# Altium PCB IF_pcb.PcbDoc
Units mm, origin at the board's own origin, x right, y up, seen from the top; angles counter-clockwise.
Board outline 46.61 x 24.13 mm, 2 copper layers (Top Layer, Bottom Layer); 30 components, 16 nets, 66 pads, 4 vias.
Unrouted connection lines stored in the file: 21.
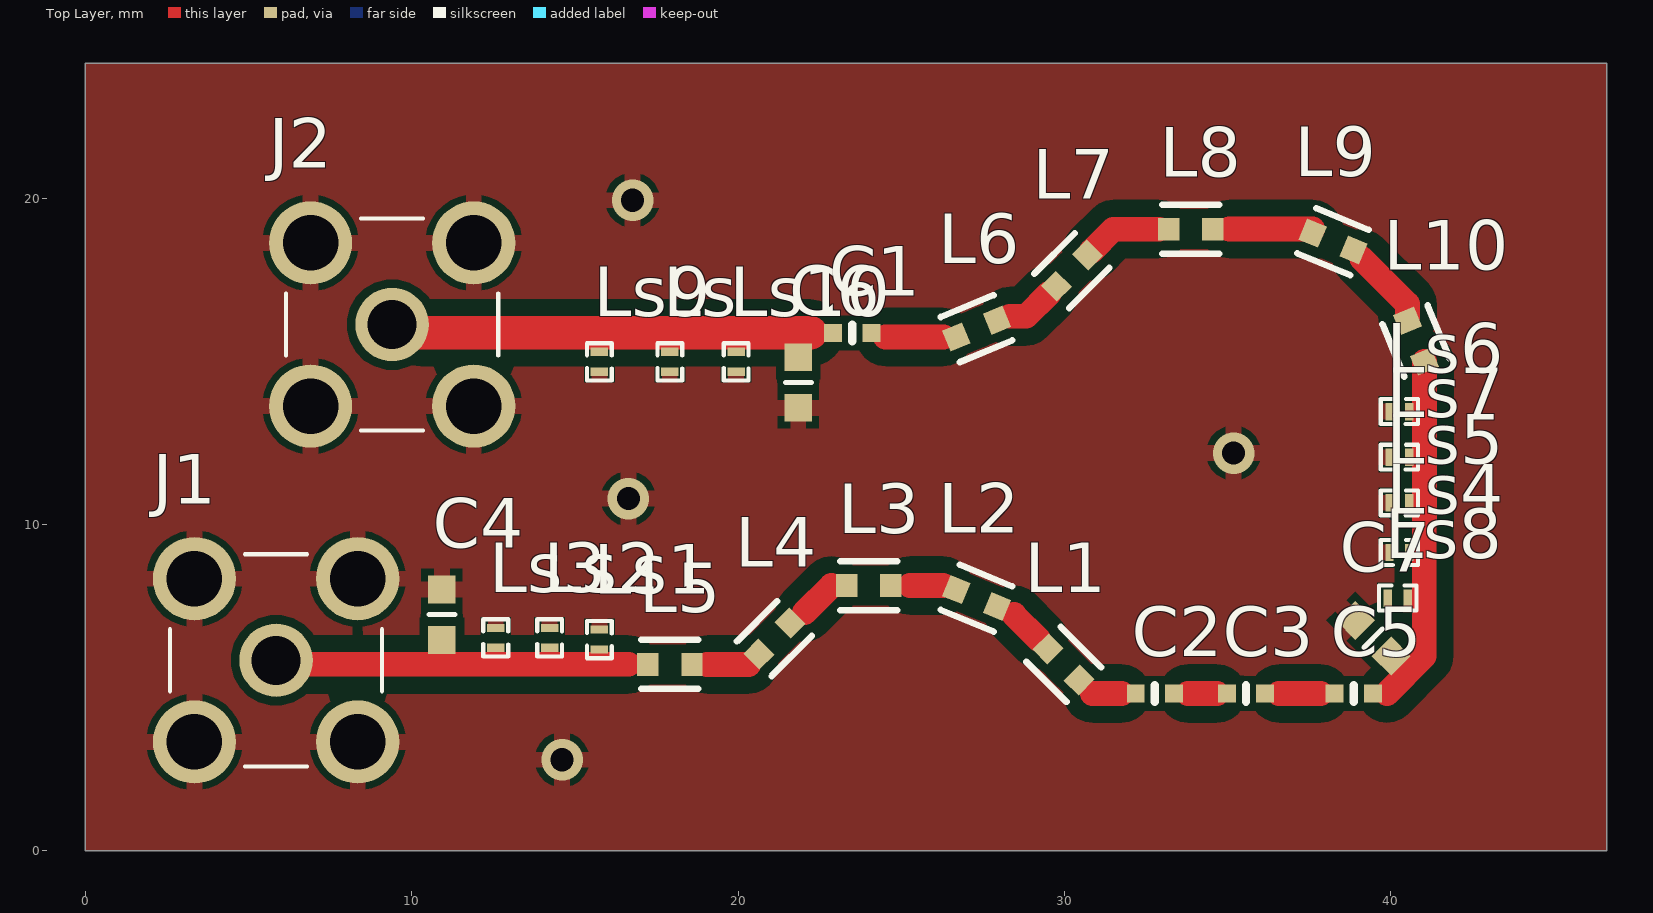
[diagram p0: Top Layer view]
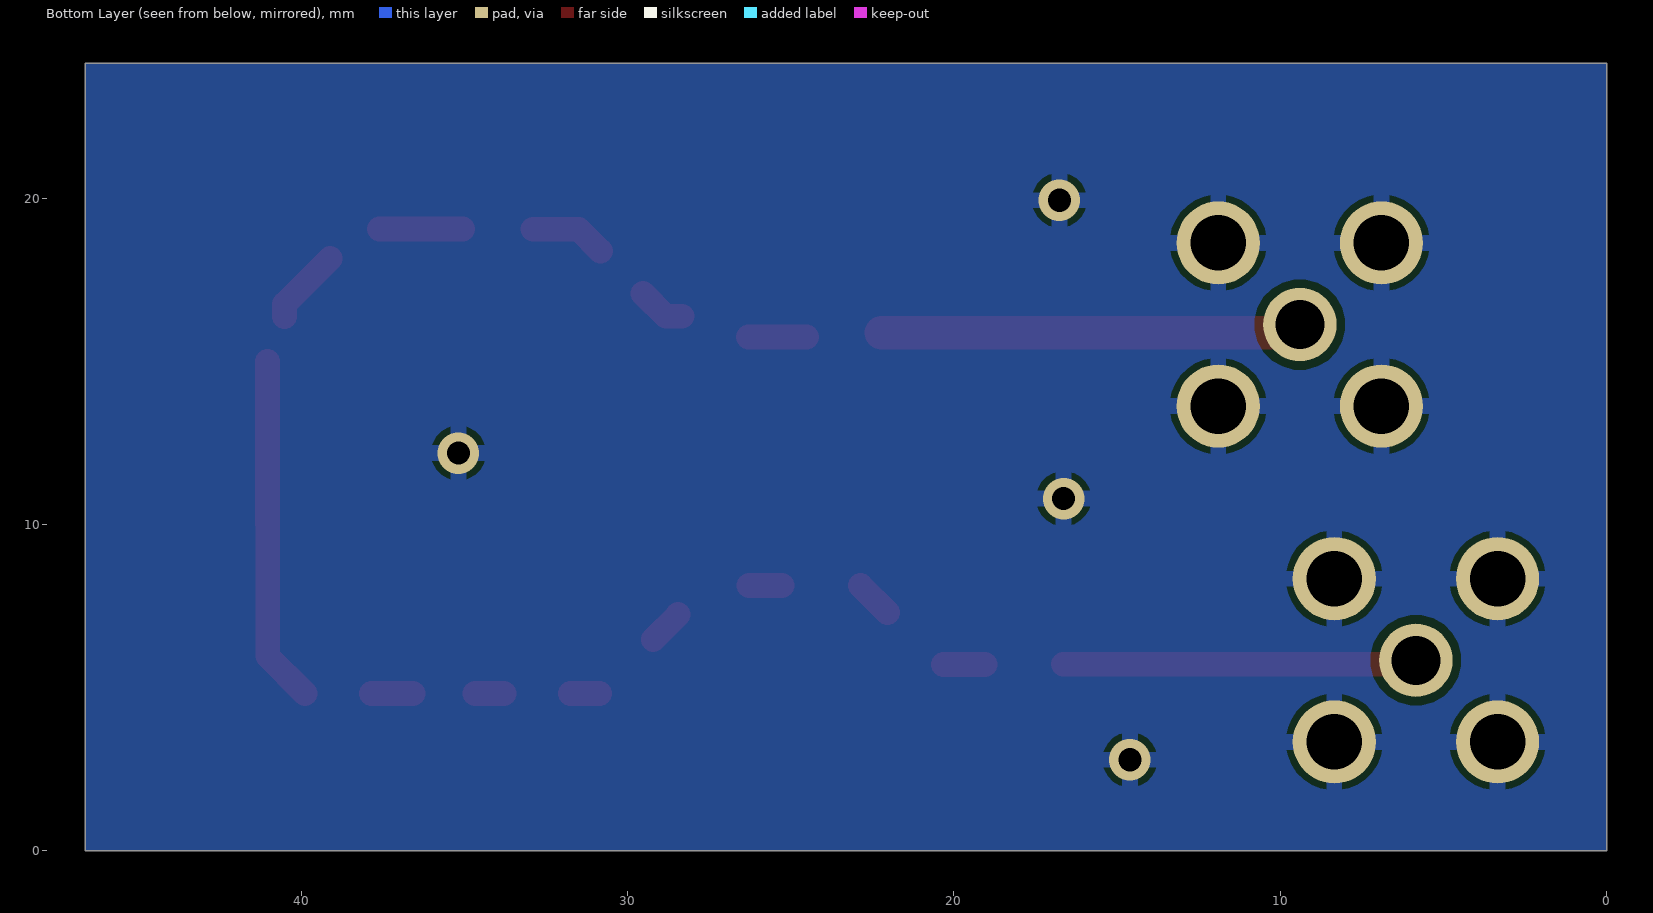
[diagram p1: Bottom Layer view, seen from below]
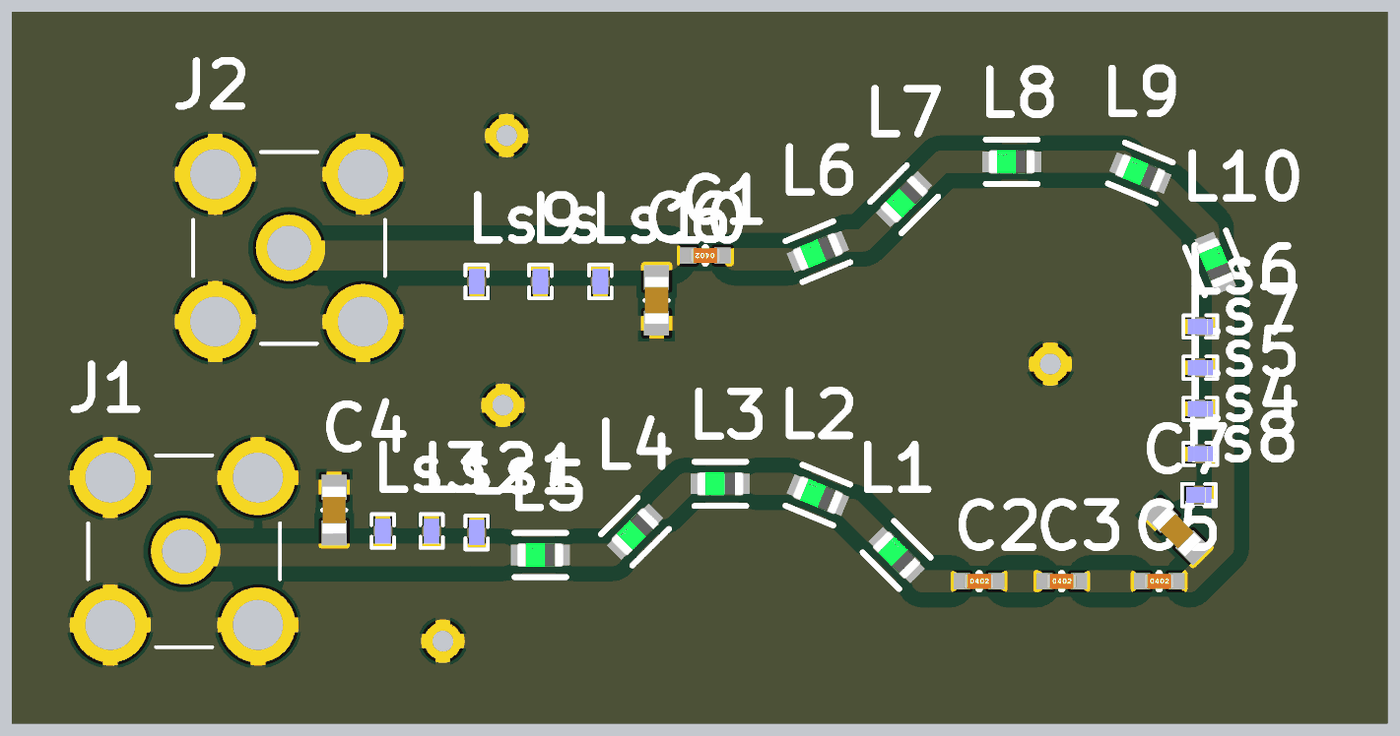
[diagram p2: 3D render of the assembled board from above, using the file's embedded part models]

## Layer stack, top to bottom
Top Solder: solder mask 0.0102, Solder Resist, Dk 3.5
Top Layer: signal copper 0.0356
Dielectric 1: dielectric 0.32, FR-4, Dk 4.8
Bottom Layer: signal copper 0.0356
Bottom Solder: solder mask 0.0102, Solder Resist, Dk 3.5

## Board outline
0,0 46.609,0 46.609,24.13 0,24.13

## Design rules (kind name [scope] priority, off if disabled: settings)
Clearance [All] p1: gap=0.254 ignorepadtopadclearanceinfootprint=FALSE except(0: Arc-Hole Track-Hole SMDPad-Hole THPad-Hole Via-Hole Fill-Hole Poly-Hole Region-Hole Text-Hole; 0.508: Arc-Fill Arc-Poly Arc-Region Track-Fill Track-Poly Track-Region Via-Fill Via-Poly Via-Region)
HoleSize [All] p1: absolutevalues=TRUE maxlimit=3 minlimit=0.7 maxpercent=80.000 minpercent=20.000
MinimumSolderMaskSliver [All] p1: minsoldermaskwidth=0.125
PlaneConnect [All] p1: planeconnectstyle=Relief reliefexpansion=0.508 reliefentries=4 reliefconductorwidth=0.305 reliefairgap=0.254
PolygonConnect [All] p1: connectstyle=Relief reliefconductorwidth=0.5 reliefentries=4 polygonreliefangle="90 Angle" airgapwidth=0.2
RoutingVias [All] p1: holewidth=0.7 width=1.6 viastyle="Through Hole" minholewidth=0.7 minwidth=1.6 maxholewidth=0.7 maxwidth=1.6
SilkToSilkClearance [All] p1: silktosilkclearance=0.12
SilkToSolderMaskClearance [IsPad] p1: minsilkscreentomaskgap=0.1 clearancetoexposedcopper=TRUE
SolderMaskExpansion [All] p1: expansion=0.102 istentingtop=FALSE
Width [All] p1: maxlimit=3.048 minlimit=0.305 preferedwidth=0.508
25 further rules are at their usual default settings.

## Components (designator, comment, footprint, x,y, rotation, side; value= is the part's Value field where it differs from the comment)
C1 "0.50pF" SMD-0402C 23.495,15.875 r90 top
C2 "0.50pF" SMD-0402C 32.766,4.826 r270 top
C3 "0.50pF" SMD-0402C 35.56,4.826 r270 top
C4 "1500pF" SMD-0603C 10.922,7.239 r180 top
C5 "0.50pF" SMD-0402C 38.862,4.826 r270 top
C6 "1500pF" SMD-0603C 21.844,14.351 r0 top
C7 "1800pF" SMD-0603C 39.457,6.517 r225 top
J1 "SMACONNECTOR" LPRS_SMACONNECTOR 5.842,5.842 r270 top
J2 "SMACONNECTOR" LPRS_SMACONNECTOR 9.398,16.129 r0 top
L1 "100nH" FP-LQG18HH_00-MFG 29.972,5.715 r135 top
L2 "390nH" FP-LQG18HH_00-MFG 27.305,7.747 r157.5 top
L3 "390nH" FP-LQG18HH_00-MFG 24.003,8.128 r180 top
L4 "390nH" FP-LQG18HH_00-MFG 21.113,6.508 r225 top
L5 "390nH" FP-LQG18HH_00-MFG 17.907,5.715 r180 top
L6 "390nH" FP-LQG18HH_00-MFG 27.305,16.002 r202.5 top
L7 "390nH" FP-LQG18HH_00-MFG 30.226,17.78 r225 top
L8 "390nH" FP-LQG18HH_00-MFG 33.869,19.05 r180 top
L9 "390nH" FP-LQG18HH_00-MFG 38.227,18.669 r157.5 top
L10 "100nH" FP-LQG18HH_00-MFG 40.767,15.621 r112.5 top
Ls "0302cs_Coil" "0302CS SERIES" 17.907,14.986 r90 top
Ls1 "0302cs_Coil" "0302CS SERIES" 15.748,6.477 r270 top
Ls2 "0302cs_Coil" "0302CS SERIES" 14.224,6.528 r270 top
Ls3 "0302cs_Coil" "0302CS SERIES" 12.573,6.528 r270 top
Ls4 "0302cs_Coil" "0302CS SERIES" 40.259,9.144 r0 top
Ls5 "0302cs_Coil" "0302CS SERIES" 40.259,10.668 r0 top
Ls6 "0302cs_Coil" "0302CS SERIES" 40.259,13.462 r0 top
Ls7 "0302cs_Coil" "0302CS SERIES" 40.259,12.065 r0 top
Ls8 "0302cs_Coil" "0302CS SERIES" 40.208,7.747 r0 top
Ls9 "0302cs_Coil" "0302CS SERIES" 15.748,14.986 r90 top
Ls10 "0302cs_Coil" "0302CS SERIES" 19.939,14.986 r90 top

## Footprints (in the part's own frame and the unit in brackets; to place one, negate y for a bottom-side part, rotate by r counter-clockwise, add the part's x,y. Pads: shape width x height; smd on the part's side, far side on the other; paste and mask are expansions set on the pad)
"0302CS SERIES" [mil] "Coilcraft Chip Inductor"
  rect 10x21 smd: 1(-12,0) 2(12,0)
  silkscreen extent -22,-15 23,15, body extent -17,-13 17,13, height 17
FP-LQG18HH_00-MFG [mm]
  rect 0.65x0.7 smd paste+0 mask+0: 1(-0.675,0) 2(0.675,0)
  silkscreen extent -0.88,-0.75 0.88,0.75, body extent -1.1,-0.58 1.1,0.57, height 0.25
LPRS_SMACONNECTOR [mm]
  round 2.25 hole 1.5: 1(0,0)
  round 2.55 hole 1.7: 2(2.5,2.5) 3(2.5,-2.5) 4(-2.5,-2.5) 5(-2.5,2.5)
  silkscreen extent -3.25,-3.25 3.25,3.25
SMD-0402C [mm]
  rect 0.55x0.55 smd: 1(0,0.584) 2(0,-0.584)
  silkscreen extent -0.25,0 0.25,0, body extent -0.25,-0.51 0.25,0.51, height 0.51
SMD-0603C [mm]
  rect 0.85x0.85 smd: 1(0,0.775) 2(0,-0.775)
  silkscreen extent -0.4,0 0.4,0, body extent -0.4,-0.8 0.4,0.8, height 0.9

## Part data
C1 C2 C3 C5: library part GRM1555C2AR50BA01D, "CAP CER 0.5PF 100V NP0 0402", Digi-Key Part Number=490-7274-1-ND, Manufacturer="Murata Electronics North America", Operating Temperature="-55°C ~ 125°C", Package / Case="0402 (1005 Metric)", Ratings=-, Temperature Coefficient="C0G, NP0", Tolerance=±0.1pF, Voltage=100V, @ qty=0, Applications="General Purpose", Datasheets=http://www.murata.com/~/media/webrenewal/support/library/catalog/products/capacitor/mlcc/c02e.pdf, Factory Stock=0, Features=-, Height - Seated (Max)=-, Image=//media.digikey.com/Renders/Murata%20Renders/ZRB-SERIES-0402.jpg, Lead Spacing=-, Lead Style=-, Minimum Quantity=1, Mounting Type="Surface Mount, MLCC", Packaging="Cut Tape (CT)", Part Number=GRM1555C2AR50BA01D, Part Status=Active, Quantity Available=19378, Series=GRM, Size / Dimension="0.039\" L x 0.020\" W (1.00mm x 0.50mm)", Thickness (Max)="0.022\" (0.55mm)", Unit Price (USD)=0.1
C4 C6: library part GCM1885C1H152JA16D, "CAP CER 1500PF 50V NP0 0603", Digi-Key Part Number=490-4967-1-ND, Manufacturer="Murata Electronics North America", Operating Temperature="-55°C ~ 125°C", Package / Case="0603 (1608 Metric)", Ratings=AEC-Q200, Temperature Coefficient="C0G, NP0", Tolerance=±5%, Voltage=50V, @ qty=0, Applications=Automotive, Datasheets=http://www.murata.com/~/media/webrenewal/support/library/catalog/products/capacitor/mlcc/c03e.ashx, Factory Stock=0, Features=-, Height - Seated (Max)=-, Image=//media.digikey.com/Renders/Murata%20Renders/0603%28GCM188%29.jpg, Lead Spacing=-, Lead Style=-, Minimum Quantity=1, Mounting Type="Surface Mount, MLCC", Packaging="Cut Tape (CT)", Part Number=GCM1885C1H152JA16D, Part Status=Active, Quantity Available=20145, Series=GCM, Size / Dimension="0.063\" L x 0.031\" W (1.60mm x 0.80mm)", Thickness (Max)="0.035\" (0.90mm)", Unit Price (USD)=0.11
C7: library part GCM1885C1H182JA16D, "CAP CER 1800PF 50V NP0 0603", Digi-Key Part Number=490-8004-1-ND, Manufacturer="Murata Electronics North America", Operating Temperature="-55°C ~ 125°C", Package / Case="0603 (1608 Metric)", Ratings=AEC-Q200, Temperature Coefficient="C0G, NP0", Tolerance=±5%, Voltage=50V, @ qty=0, Applications=Automotive, Datasheets=http://www.murata.com/~/media/webrenewal/support/library/catalog/products/capacitor/mlcc/c03e.ashx, Factory Stock=0, Features=-, Height - Seated (Max)=-, Image=//media.digikey.com/Renders/Murata%20Renders/0603%28GCM188%29.jpg, Lead Spacing=-, Lead Style=-, Minimum Quantity=1, Mounting Type="Surface Mount, MLCC", Packaging="Cut Tape (CT)", Part Number=GCM1885C1H182JA16D, Part Status=Active, Quantity Available=13070, Series=GCM, Size / Dimension="0.063\" L x 0.031\" W (1.60mm x 0.80mm)", Thickness (Max)="0.035\" (0.90mm)", Unit Price (USD)=0.16
J1 J2: "SMA female RF coaxial connector for SMA male RF antennas.", Package=None, Availability=Unavailable, MP=SMACONNECTOR, Price=None
L1 L2 L3 L4 L5 L6 L7 L8 L9 L10: library part CMP-06042-016493-1, "Multilayer type RF Inductor 1.8nH ±0.3nH 0.1Ω 1100mA 0603", Case Code (Imperial)=0603, Case Code (Metric)=1608, Current Rating=500mA, DC Resistance (DCR)=100mR, Inductance=1.8nH, Max Operating Temperature=85°C, Min Operating Temperature=-55°C, Package Quantity=4000, Self Resonant Frequency=6GHz, Test Frequency=100MHz, Case/Package=0603, Core Material=Air, DC Current=500mA, Depth=0.95mm, Height=0.8mm, Height - Seated (Max)=0.037inch, Lead Free="Lead Free", Length=1.6mm, Max DC Current=500mA, Military Standard=Not, Mount="Surface Mount", Number of Pins=2, Packaging="Tape and Reel", Q Factor=12, Radiation Hardening=No, Rated Current-Max=500mA, REACH SVHC="No SVHC", RoHS Compliant=Yes, Series=LQG18H, Shielding=Unshielded, Termination=SMD/SMT, Width=0.8mm

## Via types
v1: diameter 1.27, hole 0.711, Top Layer to Bottom Layer, 4 vias

## Nets (pads, with @x,y where several pads share a name; then routed paths per layer and width w, separated by ;. In a path a pad name is that pad's centre, name@x,y a point inside that pad or via, vN(x,y) a via of type N, cw(c..) or ccw(c..) an arc to the next point about the centre after c; other vN are vias at no path point)
GND: C4.2 C6.2 C7.2 J1.2 J1.3 J1.4 J1.5 J2.2 J2.3 J2.4 J2.5 Ls1.1 Ls2.1 Ls3.1 Ls4.1 Ls5.1 Ls6.1 Ls7.1 Ls8.1 Ls9.1 Ls10.1 Ls.1
  other v1: 14.605,2.794 16.637,10.795 35.179,12.192 16.764,19.939
NetC1_1: C1.1 C6.1 J2.1 Ls9.2 Ls10.2 Ls.2 | length 12
  Top Layer w1.016: J2.1@10.253,15.893 10.271,15.875 17.145,15.875 21.209,15.875 22.225,15.875
NetC1_2: C1.2 L6.2 | length 1.8
  Top Layer w0.762: 24.511,15.748 24.515,15.744 26.289,15.744
NetC2_1: C2.1 C3.2 | length 0.9
  Top Layer w0.762: 33.782,4.826 34.671,4.826
NetC2_2: C2.2 L1.1 | length 0.9
  Top Layer w0.762: 30.861,4.826 31.75,4.826
NetC3_1: C3.1 C5.2 | length 1.3
  Top Layer w0.762: 36.576,4.826 37.846,4.826
NetC4_1: C4.1 J1.1 L5.2 Ls1.2 Ls2.2 Ls3.2 | length 10.8
  Top Layer w0.762: J1.1 5.965,5.719 10.795,5.719 13.462,5.719 16.637,5.719
NetC5_1: C5.1 C7.1 L10.1 Ls4.2 Ls5.2 Ls6.2 Ls7.2 Ls8.2 | length 10.6
  Top Layer w0.762: 39.878,4.826 41.021,5.969 41.021,6.35 41.021,10.033 41.025,10.037 41.025,12.065 L10.1
NetL1_2: L1.2 L2.1 | length 1.1
  Top Layer w0.762: 28.448,7.239 29.21,6.477
NetL2_2: L2.2 L3.1 | length 1
  Top Layer w0.762: 25.263,8.128 26.279,8.128
NetL3_2: L3.2 L4.1 | length 1.2
  Top Layer w0.762: 22.034,7.302 22.86,8.128
NetL4_2: L4.2 L5.1 | length 1.3
  Top Layer w0.762: 19.05,5.715 20.32,5.715
NetL6_1: L6.1 L7.2 | length 1.5
  Top Layer w0.762: 28.321,16.383 28.829,16.383 L7.2@29.527,17.081
NetL7_1: L7.1 L8.2 | length 2.3
  Top Layer w0.762: L7.1@30.83,18.384 31.496,19.05 L8.2@32.893,19.05
NetL8_1: L8.1 L9.2 | length 2.6
  Top Layer w0.762: 35.048,19.054 L9.2@37.603,19.054
NetL9_1: L9.1 L10.2 | length 2.4
  Top Layer w0.762: 39.108,18.153 40.509,16.753 L10.2@40.509,16.372

## Polygon pours and split planes (outlines as drawn)
GND on Bottom Layer "GND_L02_P001" (solid, pour order 1): 0,0 0,24.13 46.609,24.13 46.609,0
GND on Top Layer "GND_L01_P000" (solid, remove dead copper, pour order 0): 0,24.13 46.609,24.13 46.609,0 0.127,0 46.609,0 0,0